# Altium PCB IMU_PCB_20241_VIAS02.PcbDoc
Units mm, origin at the board's own origin, x right, y up, seen from the top; angles counter-clockwise.
Board outline 9 x 7 mm, 2 copper layers (Top Layer, Bottom Layer), stack 0.325 mm thick; 16 components, 20 nets, 87 pads, 30 vias.
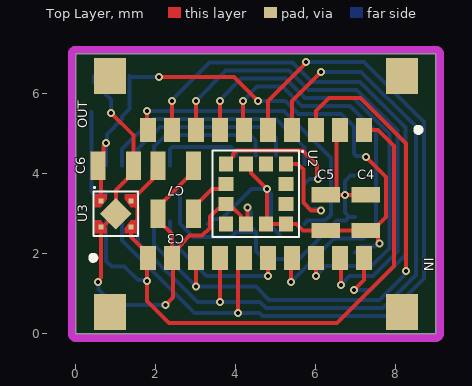
[diagram p0: Top Layer view]
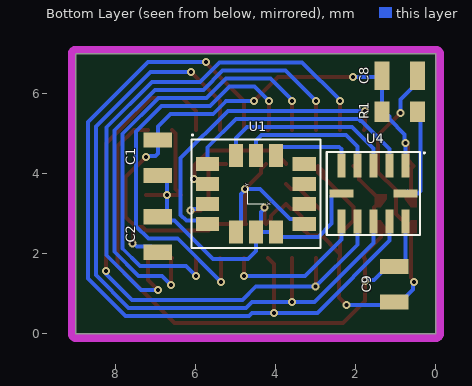
[diagram p1: Bottom Layer view, seen from below]
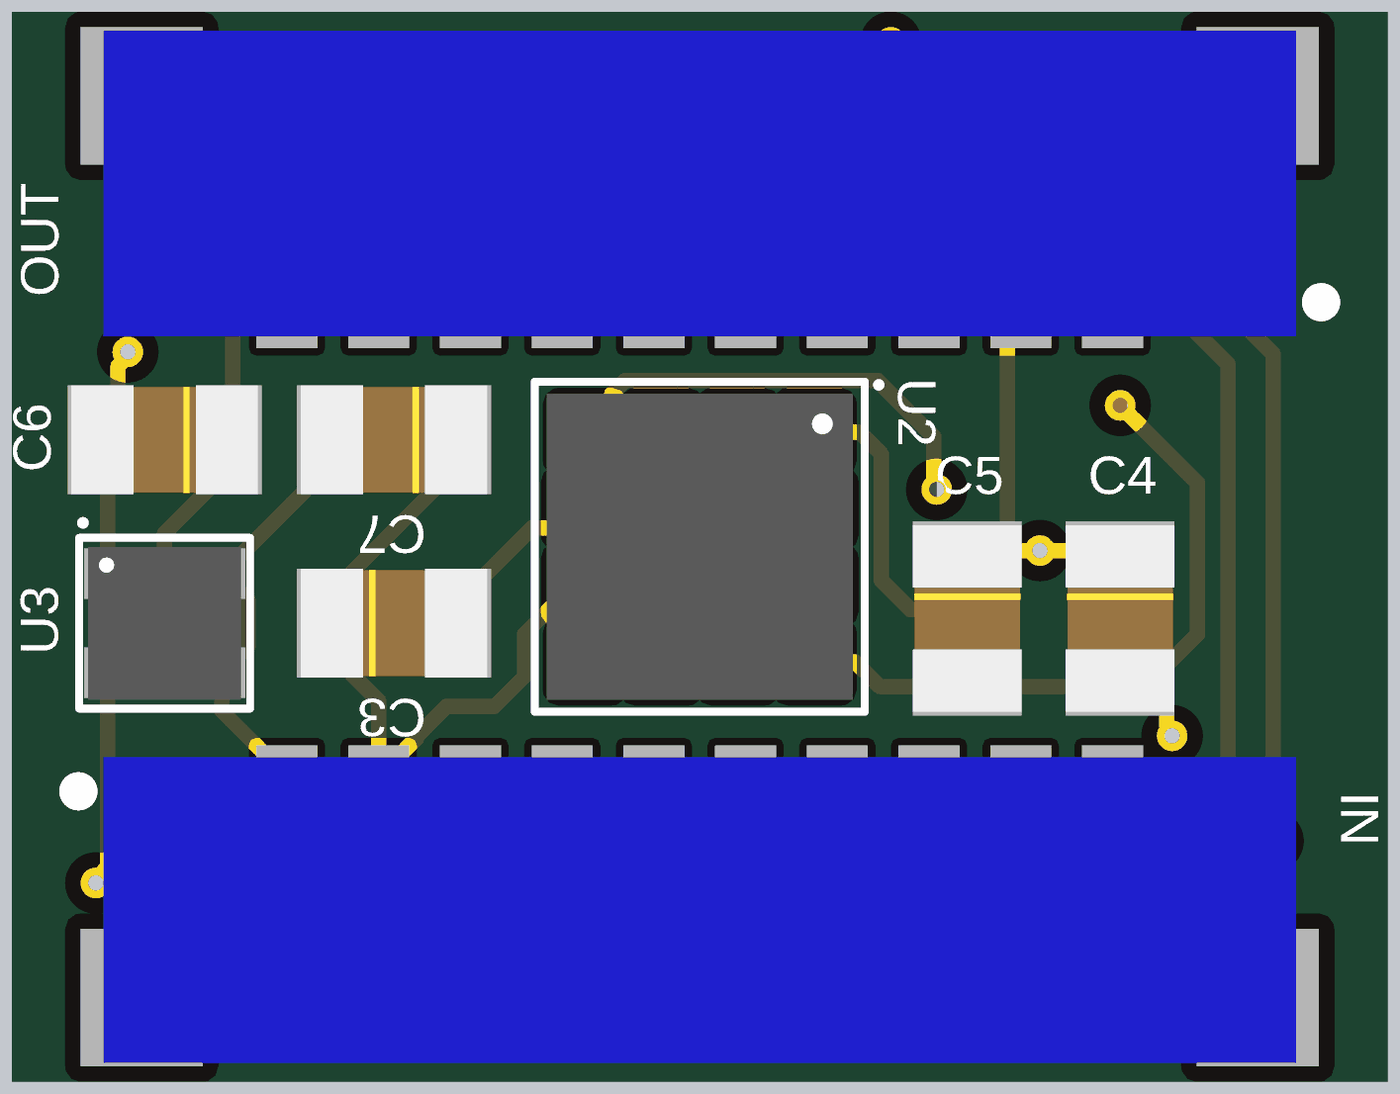
[diagram p2: 3D render of the assembled board from above, using the file's embedded part models]
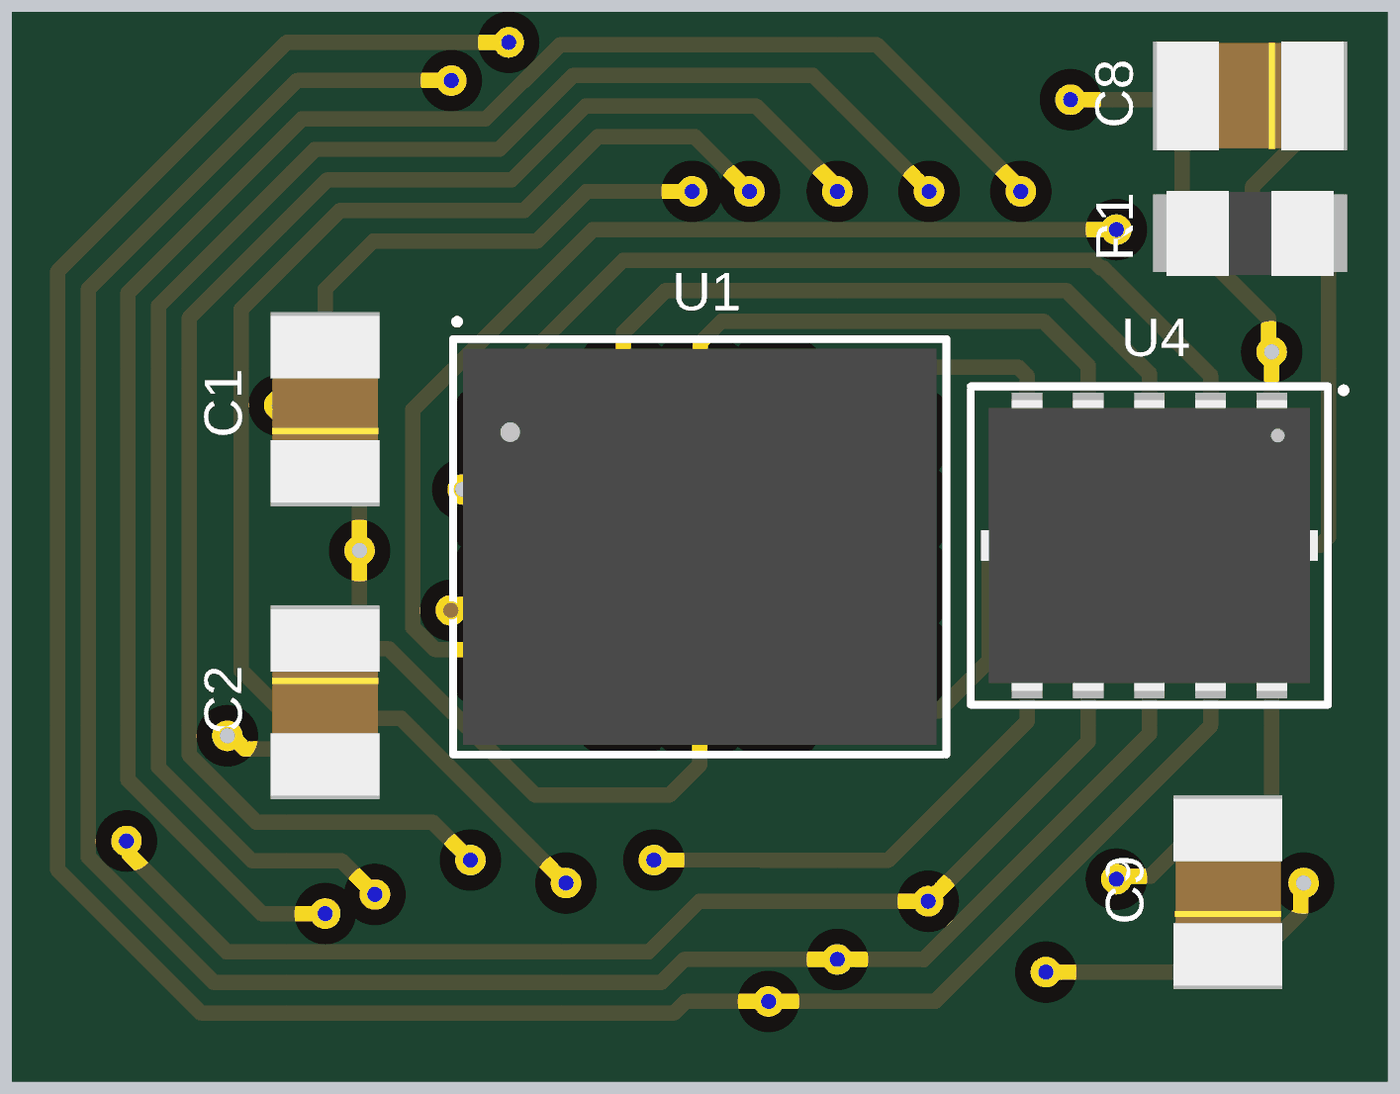
[diagram p3: 3D render of the assembled board from below, using the file's embedded part models]

## Layer stack, top to bottom
Top Solder: solder mask 0.0102, Solder Resist, Dk 3.5
Top Layer: signal copper 0.0356
Dielectric 1: core 0.254, FR-4, Dk 4.2
Bottom Layer: signal copper 0.0356
Solder Side: solder mask 0.0102, Solder Resist, Dk 3.5

## Board outline
0,7 0,0 9,0 9,7

## Design rules (kind name [scope] priority, off if disabled: settings)
Clearance Clearance_3 [OnLayer('Power Plane (VCC)') or InNet('4V')] p1: gap=0.254 ignorepadtopadclearanceinfootprint=FALSE except(0: Arc-Hole Track-Hole SMDPad-Hole THPad-Hole Via-Hole Fill-Hole Poly-Hole Region-Hole Text-Hole)
Clearance Clearance_2 [(InComponent('MPU-9250') AND OnLayer('Bottom Layer') AND HasFootprint('MPU-2950'))] p2: gap=0.1 ignorepadtopadclearanceinfootprint=FALSE except(0: Arc-Hole Track-Hole SMDPad-Hole THPad-Hole Via-Hole Fill-Hole Poly-Hole Region-Hole Text-Hole)
Clearance keepout [OnLayer('Keep-Out Layer')] p3: gap=0.1 ignorepadtopadclearanceinfootprint=FALSE except(0: Arc-Hole Track-Hole SMDPad-Hole THPad-Hole Via-Hole Fill-Hole Poly-Hole Region-Hole Text-Hole)
Clearance "Clearance - Vias Pad" [IsVia vs IsPad] p4: gap=0.1 ignorepadtopadclearanceinfootprint=FALSE except(0: Arc-Hole Track-Hole SMDPad-Hole THPad-Hole Via-Hole Fill-Hole Poly-Hole Region-Hole Text-Hole)
Clearance "Clearance Pad to Pad" [IsPad vs IsPad] p5: gap=0.1 ignorepadtopadclearanceinfootprint=FALSE except(0: Arc-Hole Track-Hole SMDPad-Hole THPad-Hole Via-Hole Fill-Hole Poly-Hole Region-Hole Text-Hole)
Clearance [All] p6: gap=0.1 ignorepadtopadclearanceinfootprint=FALSE except(0: Arc-Hole Track-Hole SMDPad-Hole THPad-Hole Via-Hole Fill-Hole Poly-Hole Region-Hole Text-Hole)
DiffPairsRouting [All] p1: maxlimit=0.254 minlimit=0.254 mostfreqgap=0.254 toplayer_minwidth=0.2 toplayer_maxwidth=0.381 toplayer_prefwidth=0.254 bottomlayer_minwidth=0.2 bottomlayer_maxwidth=0.381 bottomlayer_prefwidth=0.254 maxuncoupledlength=12.7
HoleToHoleClearance [All] p1: gap=0.1 allowstackedmicrovias=TRUE
MinimumSolderMaskSliver [All] p1: minsoldermaskwidth=0.02
PlaneConnect [All] p1: planeconnectstyle=Direct reliefexpansion=0.508 reliefentries=4 reliefconductorwidth=0.254 reliefairgap=0.254
PolygonConnect [All] p1: connectstyle=Direct reliefconductorwidth=0.254 reliefentries=4 polygonreliefangle="90 Angle" airgapwidth=0.254
RoutingLayers RoutingLayersPWR [(InNet('4V') OR InNet('5V') OR InNet('5V NON ISOLATED'))] p2: top layer_v5=TRUE bottom layer_v5=TRUE
RoutingPriority "RountingPriority Power" [(InNet('GND') OR InNet('POWER GND') OR InNet('5V') OR InNet('5V NON ISOLATED') OR InNet('24V'))] p1: routingpriority=10
RoutingPriority "RoutingPriority RS485" [(InNet('RS485_N') OR InNet('RS485_P'))] p2: routingpriority=8
RoutingPriority "RoutingPriority Hard Ones" [(InNet('SIGNAL 1 A') OR InNet('SIGNAL 1 B') OR InNet('SIGNAL 1 C') OR InNet('SIGNAL 3 A') OR InNet('SIGNAL 3 B') OR InNet('SIGNAL 3 C'))] p3: routingpriority=6
RoutingPriority [All] p4: routingpriority=0
RoutingVias RoutingVias_2 [InNet('24V')] p1: holewidth=0.711 width=1.27 viastyle="Through Hole" minholewidth=0.6 minwidth=1 maxholewidth=1.5 maxwidth=2
RoutingVias RoutingVias_3 [InNet('POWER GND')] p2: holewidth=0.711 width=1.27 viastyle="Through Hole" minholewidth=0.5 minwidth=1 maxholewidth=1.5 maxwidth=2
RoutingVias RoutingVias_1 [(InNet('MOTOR 1 A') OR InNet('MOTOR 1 B') OR InNet('MOTOR 1 SENSE') OR InNet('MOTOR 2 A') OR InNet('MOTOR 2 B') OR InNet('MOTOR 2 SENSE'))] p3: holewidth=0.3 width=0.7 viastyle="Through Hole" minholewidth=0.3 minwidth=0.7 maxholewidth=0.3 maxwidth=0.7
RoutingVias [All] p4: holewidth=0.1 width=0.2 viastyle="Through Hole" minholewidth=0.1 minwidth=0.2 maxholewidth=0.35 maxwidth=0.7
SMDNeckDown [All] p1: percent=90.000
SilkToSilkClearance [All] p1: silktosilkclearance=0.1
SilkToSolderMaskClearance SilkscreenOverComponentPads [IsPad] p1: minsilkscreentomaskgap=0.02 clearancetoexposedcopper=FALSE
SolderMaskExpansion SolderMaskExpansion_via [IsVia] p1: expansion=-0.4 istentingtop=FALSE
SolderMaskExpansion [All] p2: expansion=0.102 istentingtop=FALSE
Width [All] p1: maxlimit=2 minlimit=0.1 preferedwidth=0.1 minimp=50.000000 maximp=50.000000 favimp=50.000000
Width "Width PowerPlane" [All] p2: maxlimit=0.635 minlimit=0.508 preferedwidth=0.508
23 further rules are at their usual default settings.

## Components (designator, comment, footprint, x,y, rotation, side; value= is the part's Value field where it differs from the comment)
C1 "100nF" C0402 6.95,4.4 r90 bottom
C2 "100nF" C0402 6.95,2.482 r270 bottom
C3 "220nF" C0402 2.5,3 r0 top
C4 "100nF" C0402 7.25,3.03 r270 top
C5 "10uF" C0402 6.25,3.03 r270 top
C6 "1uF" C0402 1,4.2 r180 top
C7 "1uF" C0402 2.5,4.2 r180 top
C8 "100nF" C0402 0.9,6.45 r0 bottom
C9 "100nF" C0402 1.045,1.24 r90 bottom
IN "JST SM10B-XSRS-ETB" SM10B-XSRS-ETB 4.5,1.9 r0 top locked
OUT "JST SM10B-XSRS-ETB" SM10B-XSRS-ETB 4.5,5.1 r180 top
R1 "10K" R0402 -2.575,4.925 r0 bottom
U1 "LSM6DSRXTR" LSM6 4.5,3.5 r180 bottom
U2 "LIS2MDLTR" LIS 4.5,3.5 r270 top locked
U3 "LD39020ADTPU18R" LD3 1,3 r0 top
U4 "HPA01164RUTR" RUT12 1.559,3.508 r270 bottom

## Footprints (in the part's own frame and the unit in brackets; to place one, negate y for a bottom-side part, rotate by r counter-clockwise, add the part's x,y. Pads: shape width x height; smd on the part's side, far side on the other; paste and mask are expansions set on the pad)
C0402 [mil]
  rect 15x28 smd paste+0 mask+0: 1(-17.5,0) 2(17.5,0)
  body extent -24,-14 24,14, height 28
LD3 [mil]
  rect 5x5 smd paste-2.5 mask-2.5: 1(-14.75,12.75) 2(-14.75,-12.75) 3(14.75,-12.75) 4(14.75,12.75)
  rect 22x22 smd rot 45 paste-11 mask+0: 5(0,0)
  Top Layer region: 0,11 0,11 0,11 0,11 0,11 0,11 0,11 0,11
  Top Layer region: 0,-11 0,-11 0,-11 0,-11 0,-11 0,-11 0,-11 0,-11
  Top Layer region: 20.75,19.25 20.75,6.25 14.75,6.25 8.75,14.25 8.75,19.25
  Top Layer region: -20.75,-19.25 -20.75,-6.25 -14.75,-6.25 -8.75,-14.25 -8.75,-19.25
  Top Layer region: 20.75,-19.25 20.75,-6.25 14.75,-6.25 8.75,-14.25 8.75,-19.25
  Top Layer region: -20.75,19.25 -20.75,6.25 -14.75,6.25 -8.75,14.25 -8.75,19.25
  silkscreen extent -22,-22 22,26, body extent -20,-20 20,20, height 16
LIS [mm]
  rect 0.377x0.352 smd paste+0 mask+0.102: 1(-0.75,0.75) 2(-0.75,0.25) 3(-0.75,-0.25) 4(-0.75,-0.75) 7(0.75,-0.75) 8(0.75,-0.25) 9(0.75,0.25) 10(0.75,0.75)
  rect 0.352x0.377 smd paste+0 mask+0.102: 5(-0.25,-0.75) 6(0.25,-0.75) 11(0.25,0.75) 12(-0.25,0.75)
  silkscreen extent -1.08,-1.08 1.08,1.18, body extent -1,-1 1,1, height 0.7
LSM6 [mm]
  rect 0.577x0.352 smd paste+0 mask+0.102: 1(-1.21,0.75) 2(-1.21,0.25) 3(-1.21,-0.25) 4(-1.21,-0.75) 8(1.21,-0.75) 9(1.21,-0.25) 10(1.21,0.25) 11(1.21,0.75)
  rect 0.352x0.577 smd paste+0 mask+0.102: 5(-0.5,-0.956) 6(0,-0.956) 7(0.5,-0.956) 12(0.5,0.956) 13(0,0.956) 14(-0.5,0.956)
  silkscreen extent -1.61,-1.36 1.61,1.48, body extent -1.55,-1.3 1.55,1.3, height 0.87
R0402 [mil]
  rect 15x20 smd paste+0 mask+0: 1(119.31,-24.61) 2(154.31,-24.61)
  body extent 115,-36 158,-14, height 16
RUT12 [mm]
  rect 0.6x0.2 smd paste+0 mask+0: 1(-0.7,0.8) 2(-0.7,0.4) 3(-0.7,0) 4(-0.7,-0.4) 5(-0.7,-0.8) 7(0.7,-0.8) 8(0.7,-0.4) 9(0.7,0) 10(0.7,0.4) 11(0.7,0.8)
  rect 0.2x0.6 smd paste+0 mask+0: 6(0,-0.8) 12(0,0.8)
  silkscreen extent -1.04,-1.17 1.04,1.28, body extent -0.95,-1.1 0.95,1.1, height 0.6
SM10B-XSRS-ETB [mm] "JST XSR 10WAY angle, 0.6mm, SMD"
  rect 0.4x0.6 smd mask+0.05: 1(-2.7,0) 2(-2.1,0) 3(-1.5,0) 4(-0.9,0) 5(-0.3,0) 6(0.3,0) 7(0.9,0) 8(1.5,0) 9(2.1,0) 10(2.7,0)
  rect 0.8x0.9 smd: NC(-3.65,-1.35) NC(3.65,-1.35)
  silkscreen extent -4.11,-0.05 -4.01,0.05, body extent -3.9,-1.78 3.9,0.22, height 1.44

## Part data
C1 C2 C3 C4 C5 C6 C7 C8 C9: library part C0402, Mfr_Name=TDK
IN OUT: library part SM10B-XSRS-ETB, "JST 10WAY angle XSR, SMT, 0.6mm, SM10B-XSRS-ETB", Manufacturer=JST, Supplier Part Number 1=90W0858, Catalogue Price=1,192, Category=Connecteurs, ComponentLink1Description=http://datasheet.octopart.com/SM10B-XSRS-ETB-JST-datasheet-12514066.pdf, ComponentLink1URL=http://datasheet.octopart.com/SM10B-XSRS-ETB-JST-datasheet-12514066.pdf, ComponentLink2Description=http://www.farnell.com/datasheets/1706598.pdf, ComponentLink2URL=http://www.farnell.com/datasheets/1706598.pdf, Contact Material=Copper, Contact Plating=Tin, Contact Termination Type="Through Hole", contact_material=Copper, contact_plating=Tin, Courant=0.2A, Currency=EUR, gender=Male, Manufacturer Part Number=SM10B-XSRS-ETB, Matériau du contact="Alliage de cuivre", Minimum Order Quantity=5, mounting_style="Through Hole", Méthode de raccordement="Montage en surface", No. of Contacts=10, No. of Rows=1, Nombre de contacts=10, Nombre de rangées=1, number_of_contacts=10, Numéro de série=SM10B, Octopart Url=http://octopart.com/sm10b-xsrs-etb-jst-29522047, OctopartID=60b7a87f3daebf70, Orientation du corps=Droit, Pas=0.6mm, Pitch Spacing=0.6, Product Range="XSR Series", Product Status=IN_STOCK, Product StockNumber=820-1677, RoHS=YES, rohs_status=Compliant, Seller Landing  Url=https://octopart-clicks.com/click/track?country=IT&ak=8157f166&sig=06796d5&sid=2402&ppid=29522047&vpid=200245201&ct=offers, Stock 1=0, Stock 2=0, Supplier 1=Newark, Supplier 2=RS-Components, Supplier Part Number 2=820-1677, Séries=XSR, Tension="30 V c.a./c.c.", Type="Fil à carte"
R1: library part R0402, "No Description Available", Mfr_Name="Stackpole International"
U1 U2 U3: "No Description Available", Mfr_Name=STMicroelectronics, RefDes=RefDes, Type=Type
U4: "No Description Available", Mfr_Name="Texas Instruments", RefDes=RefDes, Type=Type

## Via types
v1: diameter 0.2, hole 0.1, Top Layer to Bottom Layer, 30 vias

## Nets (pads, with @x,y where several pads share a name; then routed paths per layer and width w, separated by ;. In a path a pad name is that pad's centre, name@x,y a point inside that pad or via, vN(x,y) a via of type N, cw(c..) or ccw(c..) an arc to the next point about the centre after c; other vN are vias at no path point)
1V8: C1.2 C2.2 C4.2 C5.2 C6.2 C8.2 R1.2 U1.5 U1.8 U2.3 U2.9 U2.10 U3.1 U4.1 | length 22.2
  Top Layer w0.1: U3.1 0.625,4.13 C6.2 0.696,4.34 0.696,4.685 0.759,4.748 v1(0.759,4.775) ; v1(2.075,6.425) 3.95,6.425 v1(4.55,5.825) ; U2.3 4.376,4.124 4.376,4.024 v1(4.775,3.625) 4.775,2.775 U2.9 U2.10 5.253,2.747 5.517,2.747 5.679,2.586 C4.2 7.335,2.671 C4.2@7.5,2.671 ; v1(7.25,4.425) 7.756,3.919 7.756,2.926 C4.2@7.5,2.671 ; v1(7.59,2.263) 7.59,2.29 7.556,2.324 7.556,2.615 C4.2@7.5,2.671
  Bottom Layer w0.1: v1@0.725,4.775 0.732,4.775 0.778,4.821 0.778,4.989 1.159,5.371 1.159,5.434 1.345,5.619 C8.2 1.369,6.425 v1(2.075,6.425) v1@2.056,6.444 ; U4.1 v1(0.759,4.775) ; U1.8 3.415,2.876 3.647,2.876 4.396,3.625 v1(4.775,3.625) 4.775,3.598 4.874,3.499 4.874,2.696 U1.5@5.092,2.479 ; v1(4.55,5.825) 5.24,5.825 5.565,5.5 6.635,5.5 6.95,5.185 C1.2 6.95,4.504 7.01,4.444 7.231,4.444 v1(7.25,4.425) ; C2.2@6.979,2.037 7.12,2.178 7.477,2.178 7.563,2.263 v1(7.59,2.263)
CSI: IN.6 U4.7 | length 3.7
  Top Layer w0.1: v1(4.8,1.45) IN.6
  Bottom Layer w0.1: U4.7 2.359,2.358 3.268,1.449 4.094,1.449 ; 4.095,1.45 v1(4.8,1.45)
Csi_1V8: U1.12 U4.5 | length 2.2
  Bottom Layer w0.1: U4.5 2.359,4.616 2.417,4.675 3.874,4.675 4,4.549 U1.12
GND: C1.1 C2.1 C3.1 C4.1 C5.1 C6.1 C7.1 C8.1 C9.1 IN.2 OUT.2 U1.6 U1.7 U2.6 U2.8 U3.2 U3.5 U4.6 | length 26.7
  Top Layer w0.1: v1(0.55,1.3) 0.55,1.327 0.625,1.402 U3.2 0.639,2.69 0.69,2.69 U3.5 1,3.59 1.445,4.035 1.445,4.965 v1(0.885,5.525) ; v1(2.236,0.717) 2.425,0.906 2.425,1.875 IN.2 IN.2@2.4,2 ; v1(4.286,3.161) 4.286,2.786 U2.8 4.124,2.876 4.124,2.952 3.952,3.124 3.876,3.124 U2.6 3.624,3.124 3.548,3.124 3.353,2.93 3.353,2.651 3.159,2.456 2.844,2.456 2.65,2.262 2.65,2.25 IN.2@2.4,2 ; OUT.2 6.512,5.012 6.512,3.615 6.371,3.475 C4.1 ; IN.2@2.4,2 2.4,2.49 2.056,2.835 2.056,3.165 2.785,3.894 C7.1@2.804,3.894 ; C7.1@2.804,3.894 2.804,4.059 C7.1 2.945,4.035 C7.1@2.804,3.894
  Bottom Layer w0.1: C8.1 0.456,6.285 0.885,5.856 v1(0.885,5.525) ; v1(0.55,1.3) 0.569,1.281 0.569,1.106 0.88,0.795 C9.1 1.123,0.717 v1(2.236,0.717) ; U4.6 2.559,3.508 2.609,3.458 2.609,2.755 2.939,2.424 3.881,2.424 U1.7 U1.6 ; v1(4.286,3.161) 4.286,3.134 4.374,3.047 4.374,2.669 U1.6 ; v1@6.69,3.485 6.725,3.45 6.725,3.031 C2.1@6.83,2.926 ; v1(6.725,3.475) 6.725,3.815 6.866,3.955 C1.1 ; C2.1@6.979,2.926 C2.1@6.83,2.926 ; U1.6 4.5,2.075 4.7,1.875 5.575,1.875 6.532,2.832 6.736,2.832 C2.1@6.83,2.926
INT1: OUT.10 U1.4 | length 7.8
  Top Layer w0.1: v1(1.775,5.575) 1.775,5.125 OUT.10
  Bottom Layer w0.1: v1(1.775,5.575) 5.2,5.575 6.378,4.397 6.378,2.975 6.231,2.828 5.789,2.828 U1.4
NetC3_2: C3.2 U2.5 | length 1.1
  Top Layer w0.1: C3.2@2.916,3.137 3.404,3.624 3.624,3.624 U2.5
NetIN_7: IN.7 OUT.6 | length 10.4
  Top Layer w0.1: v1(4.175,5.825) 4.175,5.125 OUT.6 ; v1(5.375,1.3) 5.375,1.875 IN.7
  Bottom Layer w0.1: v1(4.175,5.825) 4.534,6.184 5.164,6.184 5.648,5.7 6.853,5.7 7.5,5.053 7.5,2.689 7.189,2.378 6.453,2.378 v1(5.375,1.3)
NetIN_8: IN.8 OUT.7 | length 11.2
  Top Layer w0.1: OUT.7 v1(3.6,5.825) v1@3.6,5.85 ; v1(6,1.45) IN.8
  Bottom Layer w0.1: v1@3.6,5.85 4.134,6.384 5.247,6.384 5.731,5.9 6.936,5.9 7.84,4.996 7.84,2.14 7.397,1.697 6.247,1.697 v1(6,1.45)
NetIN_9: IN.9 OUT.8 | length 12.1
  Top Layer w0.1: OUT.8 v1@3,5.745 ; IN.9 6.625,1.875 v1(6.625,1.225)
  Bottom Layer w0.1: v1(3,5.825) 3.759,6.584 5.33,6.584 5.814,6.1 7.018,6.1 8.04,5.079 8.04,2.057 7.43,1.447 6.847,1.447 v1(6.625,1.225)
NetIN_10: IN.10 OUT.9 | length 13.4
  Top Layer w0.1: OUT.9 v1(2.4,5.825) ; v1(6.95,1.1) 7.2,1.35 IN.10
  Bottom Layer w0.1: v1(2.4,5.825) 2.4,5.841 3.342,6.784 5.413,6.784 5.646,6.55 5.65,6.55 5.9,6.3 7.101,6.3 8.24,5.162 8.24,1.974 7.366,1.1 v1(6.95,1.1)
NetR1_1: R1.1 U4.12 | length 2.5
  Bottom Layer w0.1: R1.1@0.386,5.55 0.386,3.567 0.445,3.508 U4.12 U4.12@0.709,3.558
NetU1_2: U1.2 U2.4 | length 3.4
  Top Layer w0.1: U2.4 3.75,4.263 3.924,4.437 3.924,4.5 4.012,4.588 5.662,4.588 6.031,4.219 6.031,3.894 v1(6.05,3.875)
  Bottom Layer w0.1: U1.2 5.835,3.875 v1(6.05,3.875)
NetU1_3: U1.3 U2.1 | length 2.3
  Top Layer w0.1: U2.1 5.543,4.25 5.687,4.106 5.687,3.279 5.878,3.089 6.123,3.089 v1(6.128,3.084)
  Bottom Layer w0.1: U1.3 5.836,3.124 6.061,3.124 6.101,3.084 v1(6.128,3.084)
SCK: IN.3 OUT.3 U4.8 | length 15
  Top Layer w0.1: IN.3 3,1.186 v1(3.006,1.181) ; OUT.3 6,5.567 6.333,5.9 7.112,5.9 8.25,4.762 v1(8.25,1.575)
  Bottom Layer w0.1: U4.8 1.959,2.228 v1(3.006,1.181) 4.502,1.181 4.833,0.85 7.596,0.85 8.231,1.485 8.231,1.556 v1(8.25,1.575)
SCK_1V8: U1.13 U4.4 | length 3.6
  Bottom Layer w0.1: U4.4 1.959,4.682 2.251,4.975 4.358,4.975 4.497,4.836 4.497,4.459 U1.13
SDI: IN.4 OUT.4 U4.9 | length 18
  Top Layer w0.1: v1(3.6,0.8) IN.4 ; OUT.4 5.4,5.825 v1(6.125,6.55)
  Bottom Layer w0.1: U4.9 1.559,2.274 3.036,0.797 3.04,0.8 v1(3.6,0.8) 4.6,0.8 4.75,0.65 7.679,0.65 8.5,1.471 8.5,5.184 7.134,6.55 v1(6.125,6.55)
SDI_1V8: U1.14 U4.3 | length 4.6
  Bottom Layer w0.1: U4.3 1.559,4.634 2.1,5.175 4.725,5.175 5,4.9 U1.14
SDO: IN.5 OUT.5 U4.10 | length 20.2
  Top Layer w0.1: v1(4.05,0.525) 4.05,1.75 IN.5 ; OUT.5 4.8,5.825 5.75,6.775 v1(5.75,6.8)
  Bottom Layer w0.1: U4.10 1.159,2.329 2.963,0.525 v1(4.05,0.525) ; v1@4.05,0.5 4.075,0.525 4.592,0.525 4.667,0.45 7.761,0.45 8.7,1.389 8.7,5.3 7.2,6.8 v1(5.75,6.8)
SDO_1V8: U1.1 U4.2 | length 6
  Bottom Layer w0.1: U4.2 1.159,4.621 1.863,5.325 1.879,5.325 1.929,5.375 5,5.375 5.71,4.665 U1.1
VDD: C7.2 C9.2 IN.1 OUT.1 U3.3 U3.4 U4.11 | length 17.1
  Top Layer w0.1: C7.2 1.915,4.059 1.915,3.864 U3.4 1.545,3.153 1.545,2.847 U3.3 1.375,2.425 1.8,2 IN.1 1.775,1.875 1.775,0.825 2.325,0.275 6.532,0.275 7.956,1.699 7.956,4.694 7.55,5.1 OUT.1
  Bottom Layer w0.1: U4.11 0.759,1.825 0.899,1.684 1.21,1.684 1.55,1.344 v1@1.756,1.344
  other v1: 1.775,1.325
pads on no net: IN.NC OUT.NC U1.9 U1.10 U1.11 U2.2 U2.7 U2.11 U2.12

## Keep-outs
Keep-Out Layer:
  lines w0.2: -0.1,0 ccw(c0,0) 0,-0.1 ; -0.1,0 ccw(c0,0) 0,-0.1 ; -0.1,0 -0.1,7 ; -0.1,7 cw(c0,7) 0,7.1 ; -0.1,7 cw(c0,7) 0,7.1 ; 0,-0.1 9,-0.1 ; 0,7.1 9,7.1 ; 9,-0.1 ccw(c9,0) 9.1,0 ; 9,-0.1 ccw(c9,0) 9.1,0 ; 9,7.1 cw(c9,7) 9.1,7 ; 9,7.1 cw(c9,7) 9.1,7 ; 9.1,0 9.1,7

## Text inside footprints (layer, text, board x,y; h text height)
U1: Bottom Overlay "X" at 4.257,3.198 h0.15 r90; Bottom Overlay "Y" at 4.638,3.694 h0.15 r270